# Altium PCB TimeTogetherCounter.PcbDoc
Units mil, origin at the board's own origin, x right, y up, seen from the top; angles counter-clockwise.
Board outline 2645.67 x 2677.01 mil, 4 copper layers (Top Layer, GND, PWR, Bottom Layer), stack 62.778 mil thick; 32 components, 21 nets, 141 pads, 55 vias.
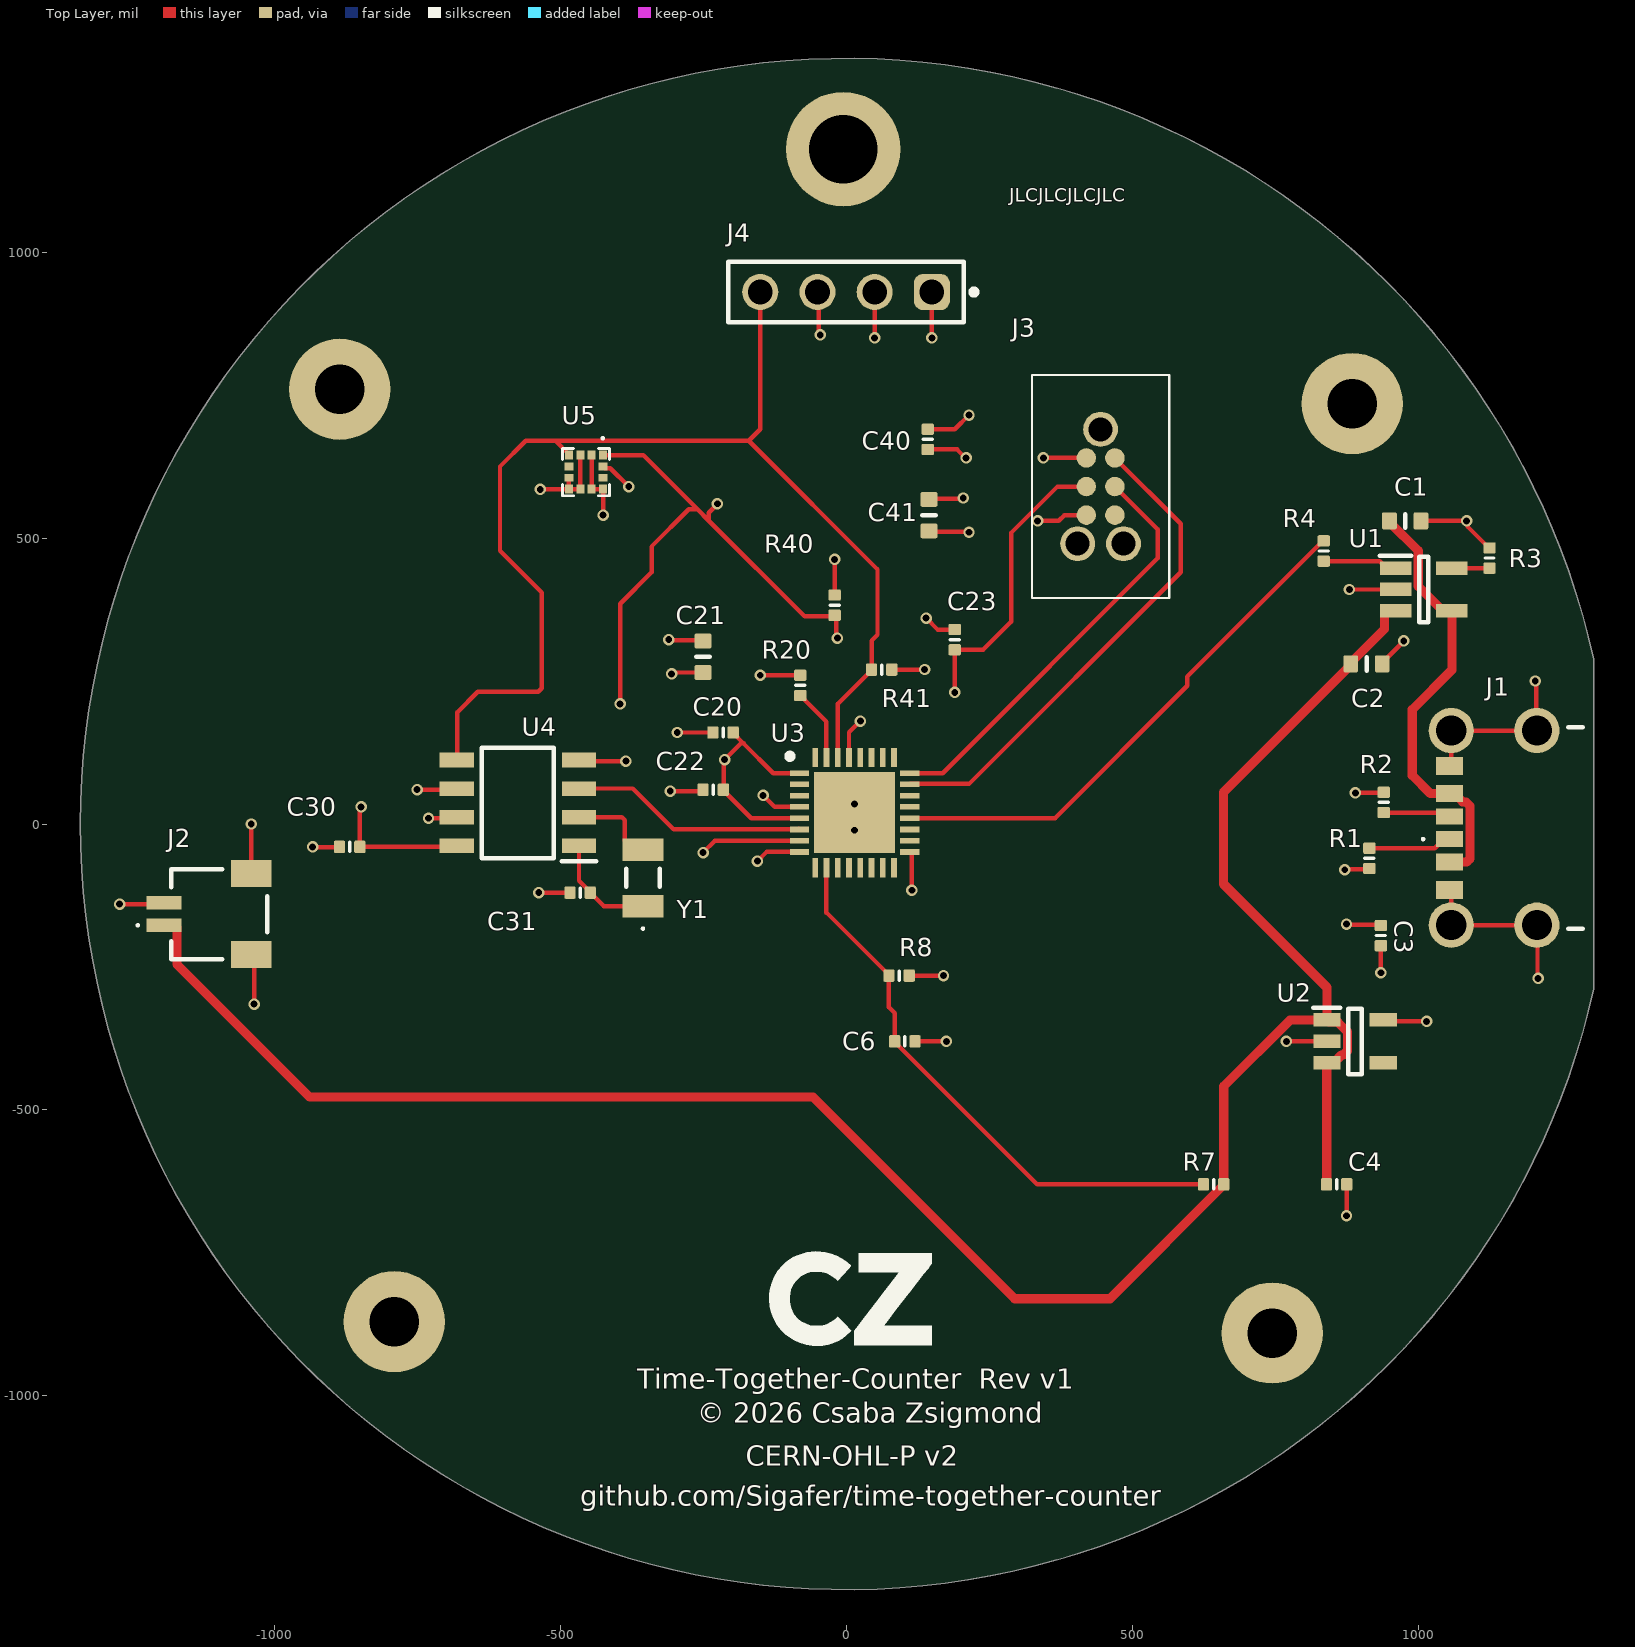
[diagram p0: Top Layer view]
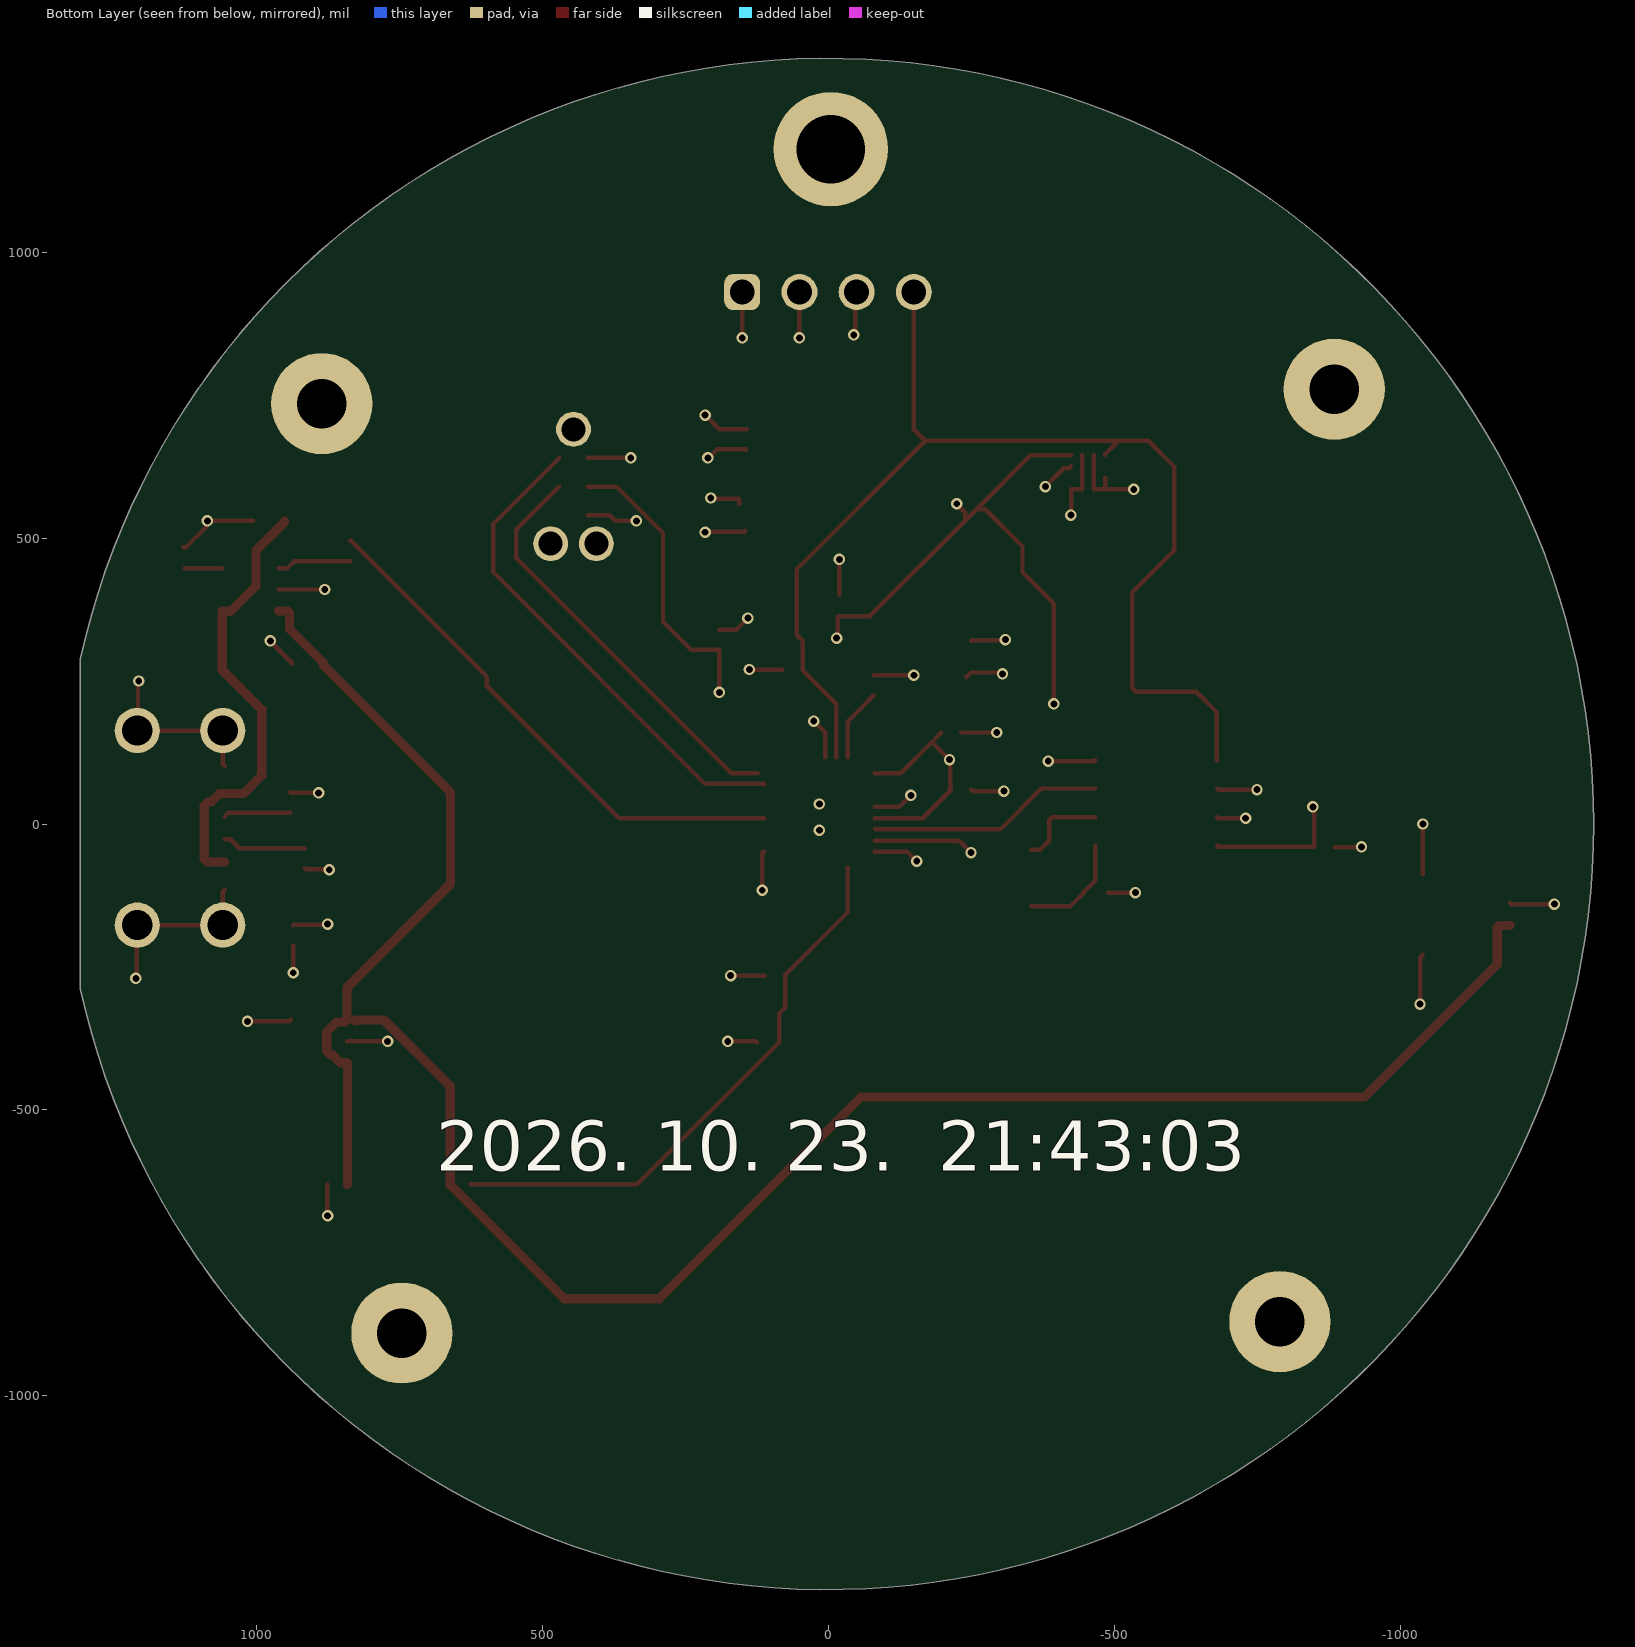
[diagram p1: Bottom Layer view, seen from below]
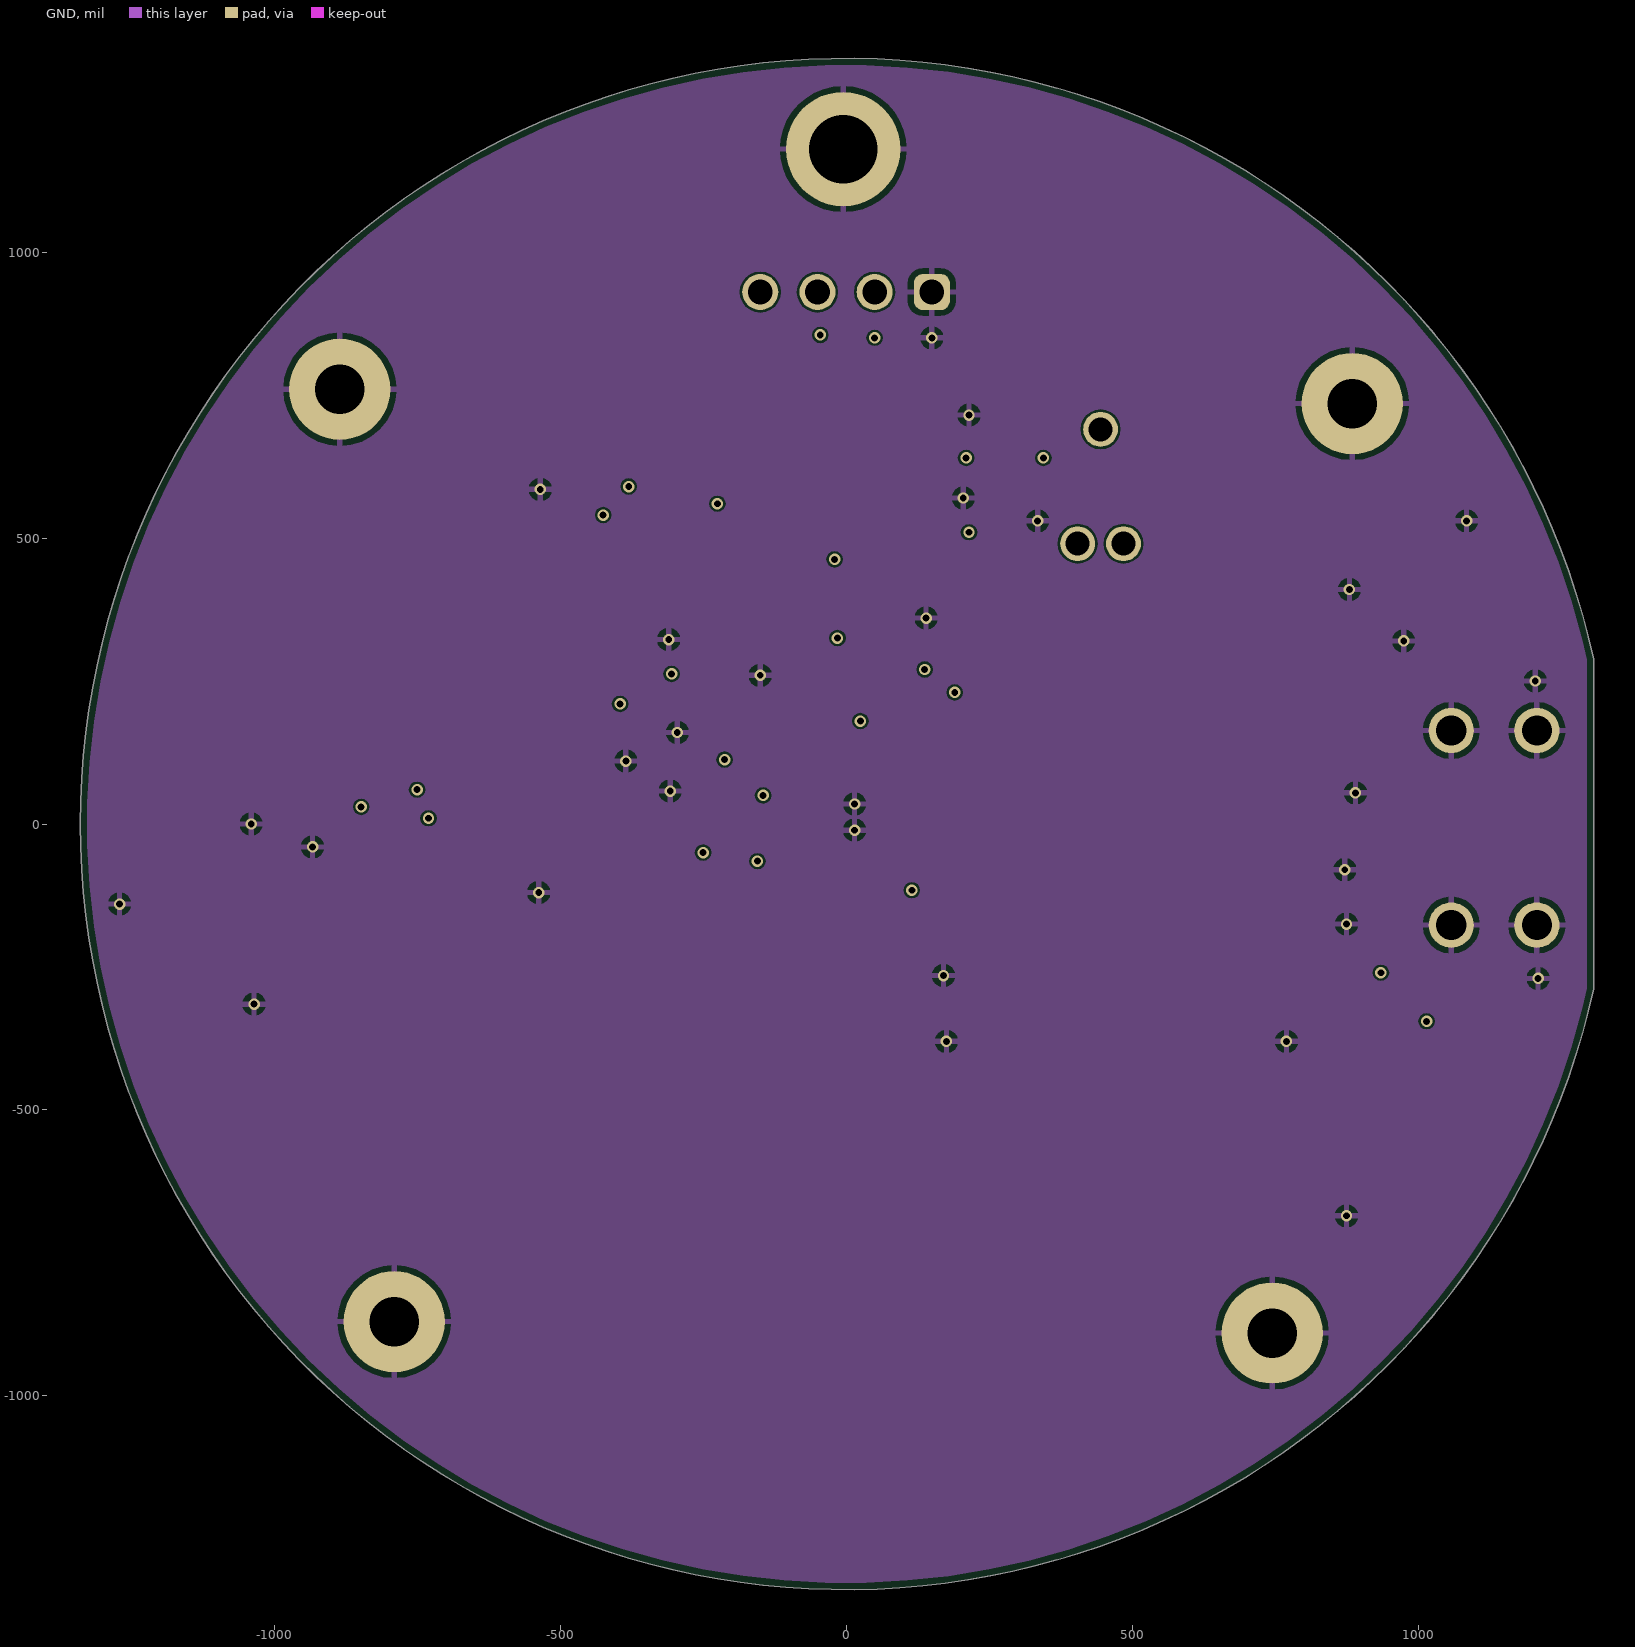
[diagram p2: GND]
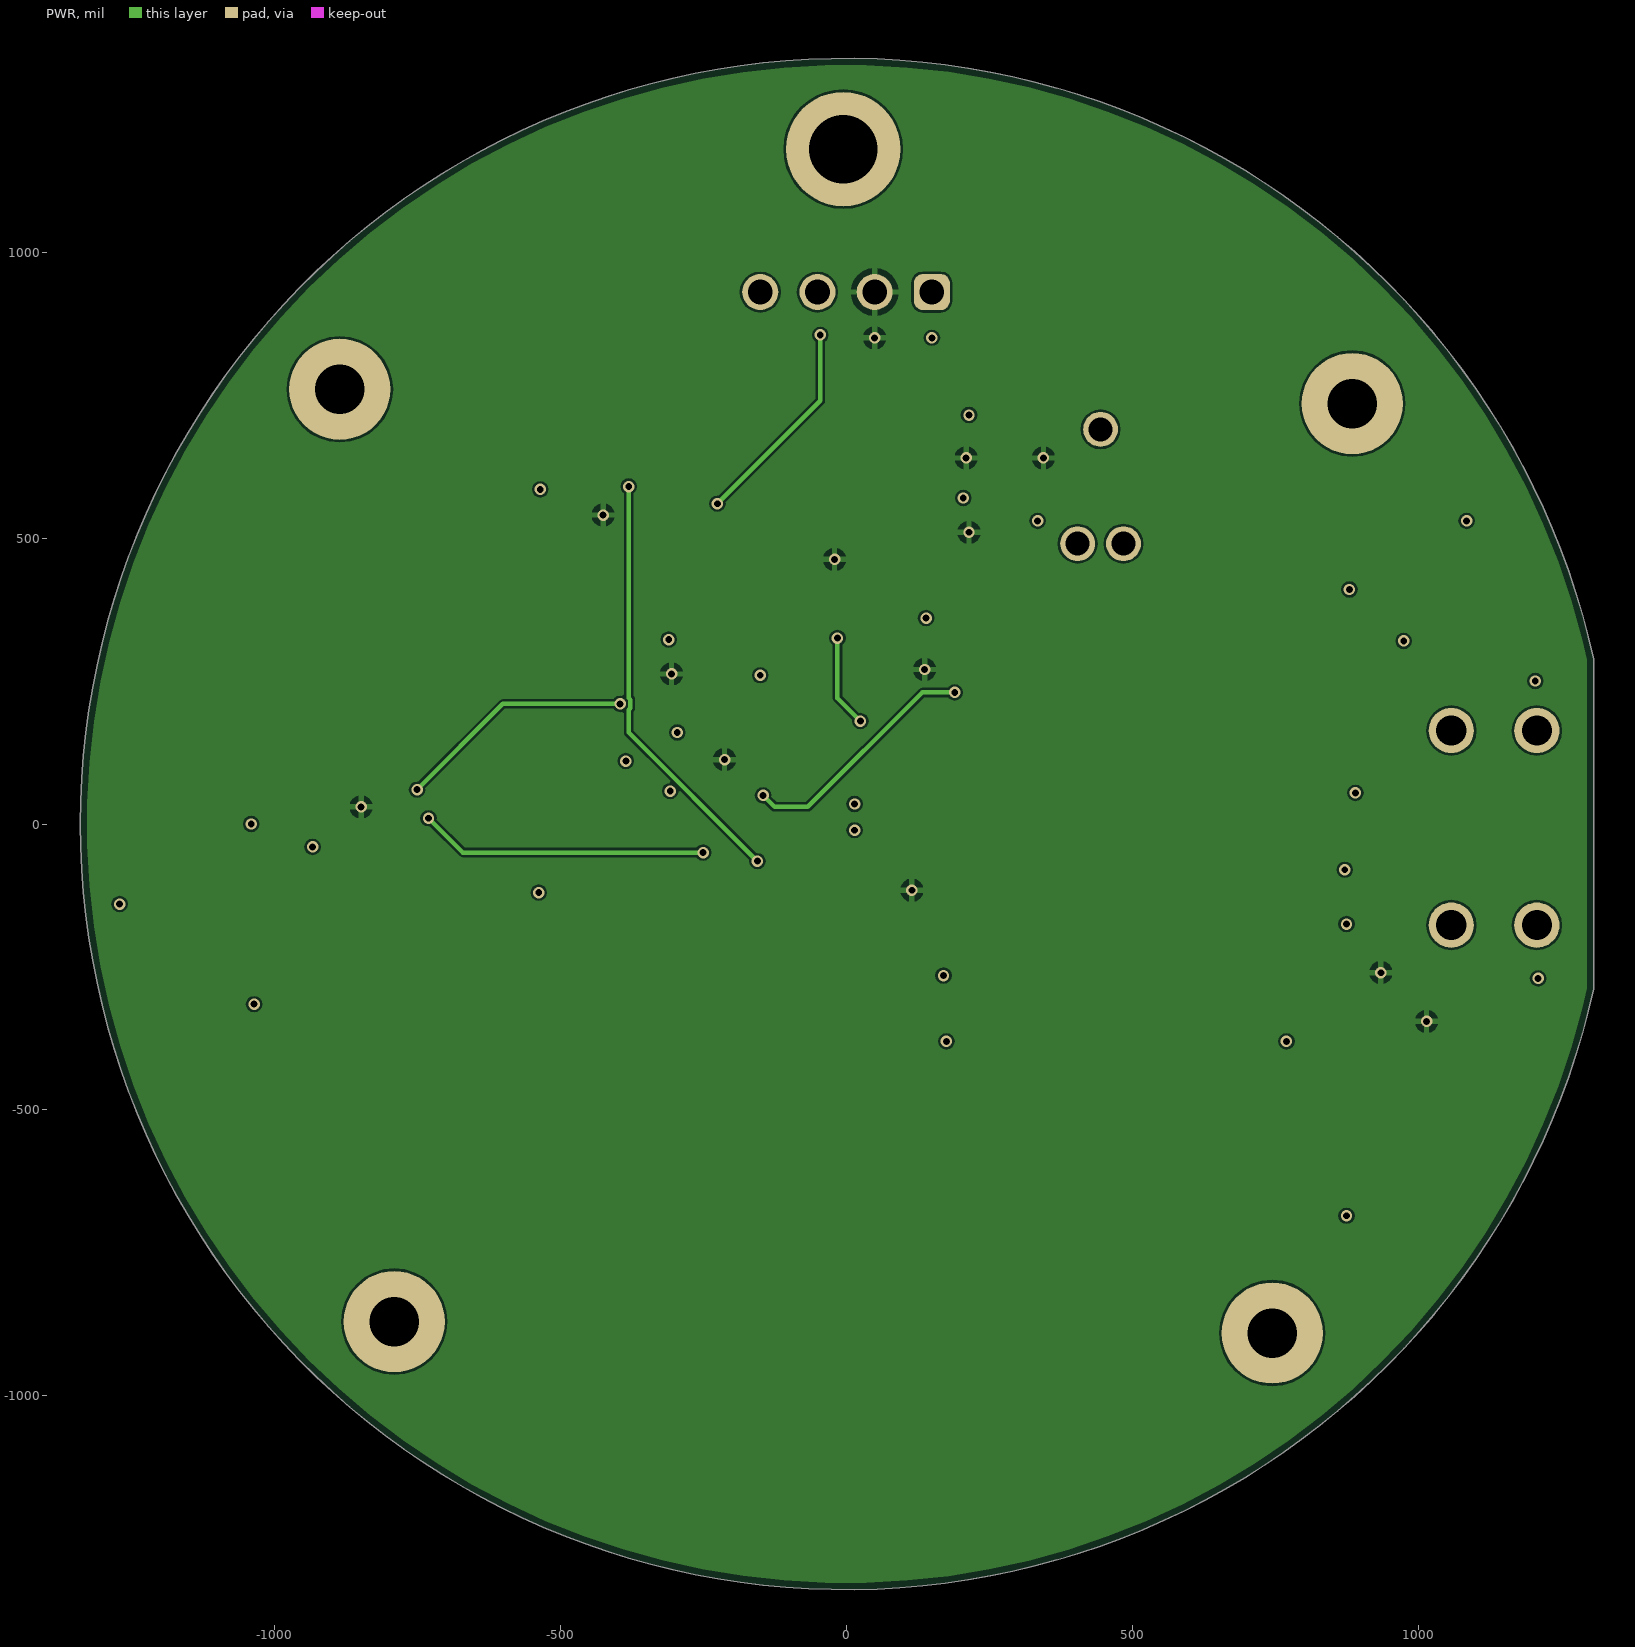
[diagram p3: PWR]

## Layer stack, top to bottom
Top Solder: solder mask 0.4, Solder Resist, Dk 3.5
Top Layer: signal copper 1.4
Dielectric 2: prepreg 8.3, PP-006, Dk 4.1
GND: signal copper 0.689
Dielectric 1: dielectric 42, FR-4, Dk 4.8
PWR: signal copper 0.689
Dielectric 3: prepreg 8.3, PP-006, Dk 4.1
Bottom Layer: signal copper 1.4
Bottom Solder: solder mask 0.4, Solder Resist, Dk 3.5

## Board outline
1307.09,-288.67 cw(c0,0) 1307.09,288.67 1307.09,288.66

## Design rules (kind name [scope] priority, off if disabled: settings)
BoardOutlineClearance [All] p1: gap=12 ignorepadtopadclearanceinfootprint=FALSE
Clearance [All] p1: gap=4 ignorepadtopadclearanceinfootprint=FALSE
ComponentClearance [All] p1: gap=8 collisioncheckmode=3 verticalgap=10 showdistances=FALSE
HoleSize [All] p1: absolutevalues=TRUE maxlimit=248 minlimit=8 maxpercent=80.000 minpercent=20.000
MinimumSolderMaskSliver [All] p1: minsoldermaskwidth=4
PolygonConnect [All] p1: connectstyle=Relief reliefconductorwidth=10 reliefentries=4 polygonreliefangle="90 Angle" airgapwidth=10
RoutingLayers [All] p1: top layer_v5=TRUE mid layer 1_v5=FALSE mid layer 2_v5=TRUE bottom layer_v5=FALSE
RoutingVias [All] p1: holewidth=12 width=20 viastyle="Through Hole" minholewidth=12 minwidth=20 maxholewidth=28 maxwidth=50
SilkToSilkClearance [All] p1: silktosilkclearance=6
SilkToSolderMaskClearance [IsText Or IsRegion] p1: minsilkscreentomaskgap=10 clearancetoexposedcopper=FALSE
SolderMaskExpansion [All] p1: expansion=0 istentingtop=FALSE
SupplyNets "Schematic Supply Nets_3" [InNet('3V3')] p1: voltage=0.000
SupplyNets "Schematic Supply Nets_2" [InNet('VBUS')] p2: voltage=0.000
SupplyNets "Schematic Supply Nets_1" [InNet('VBAT')] p3: voltage=0.000
SupplyNets "Schematic Supply Nets" [InNet('GND')] p4: voltage=0.000
Width Power [InNet('VBUS') Or InNet('VBAT')] p1: maxlimit=40 minlimit=8 preferedwidth=16
Width [All] p2: maxlimit=39 minlimit=4 preferedwidth=7.8
24 further rules are at their usual default settings.

## Components (designator, comment, footprint, x,y, rotation, side; value= is the part's Value field where it differs from the comment)
C1 "Capacitor 4.7µF +/-20% 10V 0603" CAPC0603(1608)100_L 977.56,530 r0 top value=4.7µF
C2 "Capacitor 4.7µF +/-20% 10V 0603" CAPC0603(1608)100_L 910,280 r0 top value=4.7µF
C3 "Capacitor 1µF +/-20% 10V 0402" CAPC0402(1005)60_L 935,-195 r90 top value=1µF
C4 "Capacitor 1µF +/-20% 10V 0402" CAPC0402(1005)60_L 857.72,-630 r0 top value=1µF
C6 "Capacitor 100nF +/-20% 10V 0402" CAPC0402(1005)60_L 102.72,-380 r0 top value=100nF
C20 "Capacitor 100nF +/-20% 10V 0402" CAPC0402(1005)60_L -215,160 r180 top value=100nF
C21 "Capacitor 4.7µF +/-20% 10V 0603" CAPC0603(1608)100_L -250,292.44 r90 top value=4.7µF
C22 "Capacitor 100nF +/-20% 10V 0402" CAPC0402(1005)60_L -232.28,60 r180 top value=100nF
C23 "Capacitor 100nF +/-20% 10V 0402" CAPC0402(1005)60_L 190,322.28 r90 top value=100nF
C30 "Capacitor 100nF +/-20% 10V 0402" CAPC0402(1005)60_L -867.72,-40 r180 top value=100nF
C31 "Capacitor 100nF +/-20% 10V 0402" CAPC0402(1005)60_L -465,-120 r180 top value="20pf C0G"
C40 "Capacitor 100nF +/-20% 10V 0402" CAPC0402(1005)60_L 142.86,672.36 r90 top value=100nF
C41 "Capacitor 10µF +/-20% 10V 0603" CAPC0603(1608)100_L 145,540 r90 top value=10µF
J1 "USB4125-GF-A-0190" USB4125GFA0190 1176.26,-6.73 r90 top
J2 "SM02B-SRSS_TB__LF__SN_" SM02BSRSSTBLFSN -1102.36,-157.48 r90 top
J3 "TC2030-IDC-NL" TC2030IDCNL 445,590 r270 top
J4 "61300411121" 61300411121 0,930 r180 top
R1 "5D6KR2J" RESC0402(1005)_L 915,-60 r270 top value=5.6k
R2 "5D6KR2J" RESC0402(1005)_L 940,37.72 r90 top value=5.6k
R3 "10KR2F" RESC0402(1005)_L 1125,465 r90 top value=10k
R4 "10KR2F" RESC0402(1005)_L 835,477.28 r90 top value=10k
R7 "Resistor 1M +/-1 % 0402 63 mW" RESC0402(1005)_L 642.72,-630 r180 top value=1M
R8 "Resistor 1M +/-1 % 0402 63 mW" RESC0402(1005)_L 92.72,-265 r0 top value=1M
R20 "10KR2F" RESC0402(1005)_L -80,242.28 r90 top value=10k
R40 "4D7KR2F" RESC0402(1005)_L -20,382.72 r90 top value=4.7k
R41 "4D7KR2F" RESC0402(1005)_L 62.28,270 r180 top value=4.7k
U1 "MCP73831T-2ACI_OT" SOT95P270X145-5N 1010,410 r0 top
U2 "TPS7A0233DBVR" SOT95P280X145-5N 890,-380 r0 top
U3 "STM32L031K6U6" QFN50P500X500X60-33N-D 15,20 r0 top
U4 "BM8563ESA" SOIC127P600X175-8N -573.62,36.85 r180 top
U5 "LIS2DW12TR" LGA12R50P4X4_200X200X70 -454.68,615.24 r270 top
Y1 "Q13FC13500004" Q13FC13500004FC13532768KHZ125PF -355,-94.21 r90 top

## Footprints (in the part's own frame and the unit in brackets; to place one, negate y for a bottom-side part, rotate by r counter-clockwise, add the part's x,y. Pads: shape width x height; smd on the part's side, far side on the other; paste and mask are expansions set on the pad)
61300411121 [mm] "Pin Header, pitch 2.54 mm, THT, Vertical, single row, 4p"
  rrect50% 1.6x1.6 hole 1.1: 1(-3.81,0)
  round 1.6 hole 1.1: 2(-1.27,0) 3(1.27,0) 4(3.81,0)
  silkscreen extent -5.8,-1.35 5.23,1.35, body extent -5.08,-1.27 5.08,1.27, height 8.57
CAPC0402(1005)60_L [mm] "Chip Capacitor, Body 1.0x0.5mm, Height 0.6mm, IPC High Density"
  rrect25% 0.5x0.55 smd: 1(-0.45,0) 2(0.45,0)
  silkscreen extent 0,-0.2 0,0.2, body extent -0.5,-0.25 0.5,0.25, height 0.6
CAPC0603(1608)100_L [mm] "Chip Capacitor, Body 1.6x0.8mm, Height 1.0mm, IPC High Density"
  rrect25% 0.66x0.76 smd: 1(-0.7,0) 2(0.7,0)
  silkscreen extent 0,-0.3 0,0.3, body extent -0.8,-0.4 0.8,0.4, height 0.95
LGA12R50P4X4_200X200X70 [mm]
  rect 0.4x0.35 smd: 1(-0.76,0.75) 2(-0.76,0.25) 3(-0.76,-0.25) 4(-0.76,-0.75) 7(0.76,-0.75) 8(0.76,-0.25) 9(0.76,0.25) 10(0.76,0.75)
  rect 0.35x0.4 smd: 5(-0.25,-0.76) 6(0.25,-0.76) 11(0.25,0.76) 12(-0.25,0.76)
  silkscreen extent -1.55,-1.05 1.05,1.05
Q13FC13500004FC13532768KHZ125PF [mm]
  rect 1x1.8 smd: 1(-1.25,0) 2(1.25,0)
  silkscreen extent -2.3,-0.75 0.4,0.75
QFN50P500X500X60-33N-D [mm]
  rect 0.85x0.25 smd: 1(-2.45,1.75) 2(-2.45,1.25) 3(-2.45,0.75) 4(-2.45,0.25) 5(-2.45,-0.25) 6(-2.45,-0.75) 7(-2.45,-1.25) 8(-2.45,-1.75) 17(2.45,-1.75) 18(2.45,-1.25) 19(2.45,-0.75) 20(2.45,-0.25) 21(2.45,0.25) 22(2.45,0.75) 23(2.45,1.25) 24(2.45,1.75)
  rect 0.25x0.85 smd: 9(-1.75,-2.45) 10(-1.25,-2.45) 11(-0.75,-2.45) 12(-0.25,-2.45) 13(0.25,-2.45) 14(0.75,-2.45) 15(1.25,-2.45) 16(1.75,-2.45) 25(1.75,2.45) 26(1.25,2.45) 27(0.75,2.45) 28(0.25,2.45) 29(-0.25,2.45) 30(-0.75,2.45) 31(-1.25,2.45) 32(-1.75,2.45)
  rect 3.6x3.6 smd: 33(0,0)
  silkscreen extent -3,2.38 -2.75,2.62, body extent -2.55,-2.55 2.55,2.55, height 0.6
RESC0402(1005)_L [mm] "Chip Resistor, Body 1.0x0.5mm, IPC High Density"
  rrect25% 0.5x0.55 smd: 1(-0.45,0) 2(0.45,0)
  silkscreen extent 0,-0.2 0,0.2, body extent -0.5,-0.25 0.5,0.25, height 0.3
SM02BSRSSTBLFSN [mm]
  rect 0.6x1.55 smd: 1(-0.5,2.288) 2(0.5,2.288)
  rect 1.2x1.8 smd: MP1(-1.8,-1.587) MP2(1.8,-1.587)
  silkscreen extent -2,-2.29 2,3.5, body extent -2,-2.19 2,2.76, height 2.97
SOIC127P600X175-8N [mm]
  rect 1.525x0.65 smd: 1(-2.712,1.905) 2(-2.712,0.635) 3(-2.712,-0.635) 4(-2.712,-1.905) 5(2.712,-1.905) 6(2.712,-0.635) 7(2.712,0.635) 8(2.712,1.905)
  silkscreen extent -3.47,-2.45 1.6,2.58, body extent -3,-2.45 3,2.45, height 1.75
SOT95P270X145-5N [mm]
  rect 1.4x0.6 smd: 1(-1.25,0.95) 2(-1.25,0) 3(-1.25,-0.95) 4(1.25,-0.95) 5(1.25,0.95)
  silkscreen extent -1.95,-1.45 0.2,1.5, body extent -1.35,-1.45 1.35,1.45, height 1.45
SOT95P280X145-5N [mm]
  rect 1.2x0.6 smd: 1(-1.25,0.95) 2(-1.25,0) 3(-1.25,-0.95) 4(1.25,-0.95) 5(1.25,0.95)
  silkscreen extent -1.85,-1.45 0.3,1.5
TC2030IDCNL [mm]
  round 0.863 smd paste-2539.97: 1(-1.27,-0.635) 2(-1.27,0.635) 3(0,-0.635) 4(0,0.635) 5(1.27,-0.635) 6(1.27,0.635)
  round 1.55 hole 1.067: 7(-2.54,0) 8(2.54,-1.016) 9(2.54,1.016)
  silkscreen extent -4.95,-3.05 4.95,3.05, body extent -4.95,-3.05 4.95,3.05, height 18.77
USB4125GFA0190 [mm]
  rect 0.7x1.2 smd: A5(-0.5,3.08) B5(0.5,3.08)
  rect 0.76x1.2 smd: A9(1.52,3.08) B9(-1.52,3.08)
  rect 0.8x1.2 smd: A12(2.75,3.08) B12(-2.75,3.08)
  round 2.01 hole 1.34: MH1(-4.32,3) MH2(-4.32,-0.8) MH3(4.32,-0.8) MH4(4.32,3)
  silkscreen extent -4.47,-2.84 4.47,4.3, body extent -4.47,-3.45 4.47,3.45, height 3.26

## Part data
C1 C2 C21: library part CMP-001-00076-4, "Chip Capacitor, 4.7µF +/-20%, 10V, 0603, Thickness 1 mm", Case/Package=0603, Max Operating Temperature=85°C, Min Operating Temperature=-55°C, Tolerance=10%, Voltage Rating=10V, Mounting Technology=SMT, Pins=2
C3 C4: library part CMP-001-00063-3, "Chip Capacitor, 1µF +/-20%, 10V, 0402, Thickness 0.6 mm", Case/Package=0402, Max Operating Temperature=85°C, Min Operating Temperature=-55°C, Tolerance=10%, Voltage Rating=10V, Mounting Technology=SMT, Pins=2
C6 C20 C22 C23 C30 C31 C40: library part CMP-001-00061-3, "Chip Capacitor, 100nF +/-20%, 10V, 0402, Thickness 0.6 mm", Case/Package=0402, Max Operating Temperature=85°C, Min Operating Temperature=-55°C, Tolerance=20%, Voltage Rating=10V, Mounting Technology=SMT, Pins=2
C41: library part CMP-001-00075-4, "Chip Capacitor, 10µF +/-20%, 10V, 0603, Thickness 1 mm", Case/Package=0603, Max Operating Temperature=85°C, Min Operating Temperature=-55°C, Tolerance=10%, Voltage Rating=10V, Mounting Technology=SMT, Pins=2
J1: "Connector", Manufacturer_Name="GCT (GLOBAL CONNECTOR TECHNOLOGY)", Mouser Part Number=640-USB4125-GF-A-190, Datasheet Link=https://eu.mouser.com/datasheet/2/837/usb4125-2448699.pdf, Manufacturer_Part_Number=USB4125-GF-A-0190, Mouser Price/Stock=https://www.mouser.co.uk/ProductDetail/GCT/USB4125-GF-A-0190?qs=QNEnbhJQKvbCz4hEJBS24w%3D%3D
J2: library part SM02B-SRSS-TB__LF__SN_, "Connector", Manufacturer_Name="JST (JAPAN SOLDERLESS TERMINALS)", Manufacturer_Part_Number="SM02B-SRSS-TB (LF)(SN)", Datasheet Link=https://www.jst-mfg.com/product/pdf/eng/eSH.pdf, Height=2.9mm
J3: "Connector", Manufacturer_Name="Tag Connect", Height=18.669mm, Manufacturer_Part_Number=TC2030-IDC-NL
J4: library part CMP-1502-01064-4, "THT Vertical Pin Header WR-PHD, Pitch 2.54 mm, Single Row, 4 pins", Color=Black, Contact Resistance=20mΩ, Current Rating=3A, Max Operating Temperature=105°C, Min Operating Temperature=-40°C, Operating Supply Voltage=250V, Connector Type="Male Pin", Contact Material=Gold, Contact Mating Length=5.9944mm, Contact Plating=Gold, Gender=Male, Height=8.89mm, Lead Free="Lead Free", Lead Pitch=2.54mm, Mount="Through Hole", Number of Contacts=4, Number of Pins=4, Number of Positions=4, Number of Rows=1, Orientation=Vertical, Packaging=Bulk, Pitch=2.54mm, RoHS=Compliant, Termination=Solder, Voltage Rating=250V
R1 R2: library part CMP-009-00108-2, "5K6 0.063W 5% 0402 (1005 Metric)  SMD", Case/Package=0402, Power=63mW, Tolerance=5%, Mounting Technology=SMT, Pins=2
R3 R4 R20: library part CMP-009-00066-2, "10K 0.063W 1% 0402 (1005 Metric)  SMD", Case/Package=0402, Power=63mW, Tolerance=1%, Mounting Technology=SMT, Pins=2
R7 R8: library part CMP-009-00165-3, "Chip Resistor, 1 MOhms, +/-1 %, 63 mW, -55 to 155 degC, 0402", Case/Package=0402, Power=63mW, Tolerance=1%, Pins=2
R40 R41: library part CMP-009-00105-2, "4K7 0.063W 1% 0402 (1005 Metric)  SMD", Case/Package=0402, Power=63mW, Tolerance=1%, Mounting Technology=SMT, Pins=2
U1: "Integrated Circuit", Arrow Part Number=MCP73831T-2ACI/OT, Manufacturer_Name=Microchip, Mouser Part Number=579-MCP73831T-2ACIOT, Arrow Price/Stock=https://www.arrow.com/en/products/mcp73831t-2aci-ot/microchip-technology.html?utm_currency=USD&region=nac, Datasheet Link=http://ww1.microchip.com/downloads/en/DeviceDoc/20001984g.pdf, Height=1.45mm, Manufacturer_Part_Number=MCP73831T-2ACI/OT, Mouser Price/Stock=https://www.mouser.co.uk/ProductDetail/Microchip-Technology/MCP73831T-2ACI-OT?qs=yUQqVecv4qvbBQBGbHx0Mw%3D%3D
U2: "Integrated Circuit", Manufacturer_Name="Texas Instruments", Mouser Part Number=595-TPS7A0233DBVR, Arrow Part Number=TPS7A0233DBVR, Arrow Price/Stock=https://www.arrow.com/en/products/tps7a0233dbvr/texas-instruments.html?utm_currency=USD&region=nac, Datasheet Link=https://www.ti.com/lit/gpn/tps7a02, Height=1.45mm, Manufacturer_Part_Number=TPS7A0233DBVR, Mouser Price/Stock=https://www.mouser.co.uk/ProductDetail/Texas-Instruments/TPS7A0233DBVR?qs=QNEnbhJQKvZidySW4FDctA%3D%3D
U3: "Integrated Circuit", Manufacturer_Name=STMicroelectronics, Mouser Part Number=511-STM32L031K6U6, Arrow Part Number=STM32L031K6U6, Arrow Price/Stock=https://www.arrow.com/en/products/stm32l031k6u6/stmicroelectronics?utm_currency=USD&region=nac, Datasheet Link=https://www.st.com/resource/en/datasheet/stm32l031g4.pdf, Height=0.6mm, Manufacturer_Part_Number=STM32L031K6U6, Mouser Price/Stock=https://www.mouser.co.uk/ProductDetail/STMicroelectronics/STM32L031K6U6?qs=U58vgkJzipQU%2FBNiv87OVQ%3D%3D
U4: library part PCF8563T, "Integrated Circuit", Manufacturer_Name=NXP, Mouser Part Number=N/A, Datasheet Link=https://www.nxp.com/docs/en/data-sheet/PCF8563.pdf, Height=1.75mm, Manufacturer_Part_Number=PCF8563T, Mouser Price/Stock=https://www.mouser.co.uk/ProductDetail/NXP-Semiconductors/PCF8563T?qs=F5EMLAvA7IDH70aFPvsqMw%3D%3D
U5: "Accelerometer X, Y, Z Axis Â±2g, 4g, 8g, 16g 400Hz 12-LGA _2x2_", Package="LGA-12 STMicroelectronics", Availability=Unavailable, MF=STMicroelectronics, MP=LIS2DW12TR, Price=None, SnapEDA_Link=https://www.snapeda.com/parts/LIS2DW12TR/STMicroelectronics/view-part/621283/?ref=snap
Y1: library part Q13FC13500004_FC-135_32.768KHZ_12.5PF, "Crystal or Oscillator", Manufacturer_Name="Epson Timing", Manufacturer_Part_Number="Q13FC13500004 FC-135 32.768KHZ 12.5PF", Datasheet Link=https://support.epson.biz/td/api/doc_check.php?mode=dl&lang=en&Parts=FC-135, Height=0.9mm

## Free pads (board coordinates)
  round 177 hole 86.6: H1(745,-890) H2(-790,-870) H3(-885,760) H4(885,735)
  round 200 hole 120: K1(-5,1180)

## Via types
v1: diameter 20, hole 12, Top Layer to Bottom Layer, tented both sides, 55 vias

## Nets (pads, with @x,y where several pads share a name; then routed paths per layer and width w, separated by ;. In a path a pad name is that pad's centre, name@x,y a point inside that pad or via, vN(x,y) a via of type N, cw(c..) or ccw(c..) an arc to the next point about the centre after c; other vN are vias at no path point)
3V3: C3.1 C20.1 C21.1 C22.1 C30.1 C40.1 C41.1 J3.1 J4.2 R40.2 R41.1 U2.5 U3.1 U3.5 U3.17 U4.8 U5.2 U5.9 U5.10 | length 1446.1
  Top Layer w7.8: v1(-847.72,30) -850,27.72 C30.1 -682.24,-40 U4.8 ; U5.2 U5.9 U5.10 -424.88,585.04 -424.88,540.35 v1(-424.61,540.08) ; v1(-305,262.44) -301.7,262.44 -299.26,264.88 C21.1 C21.1@-241.51,256.39 ; C20.1 -197.28,159.02 -179.13,140.87 ; U3.5 -165.71,10.16 -214.57,59.02 C22.1 -213.48,61.08 -213.48,111.44 v1(-212.4,112.52) -184.06,140.87 -179.13,140.87 ; U3.1 -127.17,88.9 -179.13,140.87 ; R40.2 v1(-20,462.72) ; v1(50,850) J4.2 ; R41.1 80.08,270.08 137.4,270.08 v1(137.48,270.16) ; U3.17 113.98,-48.9 115,-49.92 v1(115,-115.83) ; C40.1 143.04,654.82 194.13,654.82 208.96,640 v1(210,640) ; C41.1 146.22,511.22 213.78,511.22 v1(215,510) ; v1(345,640) J3.1 ; v1(935,-260) C3.1 ; U2.5 941.61,-345 v1(1015,-345)
CHG_STAT: R4.2 U3.20 | length 933.9
  Top Layer w7.8: U3.20 365.47,10.16 596.77,241.46 596.77,257.76 834.02,495 R4.2
GND: C1.2 C2.2 C3.2 C4.2 C6.2 C20.2 C21.2 C22.2 C23.2 C30.2 C31.2 C40.2 C41.2 J1.A12 J1.B12 J1.MH1 J1.MH2 J1.MH3 J1.MH4 J2.2 J2.MP1 J2.MP2 J3.5 J4.1 pad.H1 pad.H2 pad.H3 pad.H4 pad.K1 R1.2 R2.2 R3.2 R8.2 R20.2 U1.2 U2.2 U3.33 U4.4 U5.3 U5.6 U5.7 U5.8 | length 2481.9
  Top Layer w7.8: v1(-1270,-140) -1194.65,-140 J2.2 ; v1(-1040,0) -1040,-86.5 J2.MP2 ; J2.MP1 -1035,-233.23 v1(-1035,-315) ; v1@-932.43,-40.29 C30.2@-885.72,-40.29 ; v1(-537.28,-120) C31.2@-490,-120 ; v1(-534.61,585.08) -534.49,585.2 -484.72,585.2 -484.41,585.51 -484.41,605.2 U5.6 ; U5.7 U5.8 U5.3 ; U4.4 -465,110 v1(-385,110) ; v1(-310,322.44) -308.78,321.22 -251.22,321.22 C21.2 ; v1@-304.47,57.15 -252.85,57.15 C22.2 ; v1(-295,160) C20.2 ; v1(-150,260) R20.2 ; R8.2 v1(170.43,-265) ; C6.2@124.33,-382.57 124.33,-382.04 126.38,-380 v1(175.43,-380) ; v1(140,360) 160,340 C23.2 ; C40.2@141.68,690.04 190.04,690.04 v1(215,715) ; v1(150,850) J4.1 ; C41.2@155.12,560.12 155.12,567.84 156.06,568.78 203.78,568.78 v1(205,570) ; v1(335,530) 371.78,530 381.78,540 J3.5 ; v1(770,-380) U2.2 ; v1(872,-80) 873.14,-78.86 913.86,-78.86 R1.2 ; v1(875,-685) 875.22,-684.78 875.22,-630.22 C4.2 ; v1(875,-175) 876.14,-176.14 933.86,-176.14 C3.2 ; v1(880,410) U1.2 ; v1(890.56,54.44) 891.05,54.94 939.51,54.94 R2.2 ; C2.2 937.56,281.96 975,319.4 v1(975,320) ; C1.2 v1(1085,530) 1087.33,527.67 1087.33,519.4 1123.19,483.55 R3.2@1127.27,483.55 ; J1.B12 1058.15,-118.15 J1.MH1 J1.MH2 1208.88,-177.93 1208.88,-268.88 v1(1210,-270) ; J1.A12 1058.15,104.68 J1.MH4 J1.MH3 1206.38,164.72 1206.38,248.62 v1(1205,250)
  other v1: -932.72,-40 15,-10.83 15,35 -307.4,57.52
NetC31_1: C31.1 U4.1 Y1.1 | length 192.5
  Top Layer w7.8: U4.1 -466.85,-99.45 -447.28,-119.02 C31.1 -447.28,-120.98 -441.34,-126.93 -440.36,-126.93 -423.86,-143.43 Y1.1
NetJ1_A5: J1.A5 R1.1 | length 146.6
  Top Layer w7.8: R1.1 1029.29,-42.28 1045.16,-26.42 J1.A5
NetJ1_B5: J1.B5 R2.1 | length 117.9
  Top Layer w7.8: R2.1 1047.95,20 J1.B5
NetR3_1: R3.1 U1.5 | length 65.8
  Top Layer w7.8: U1.5 1059.33,447.28 R3.1
NetR4_1: R4.1 U1.1 | length 130.8
  Top Layer w7.8: R4.1 932.87,459.57 945.04,447.4 U1.1
NetR20_1: R20.1 U3.31 | length 127.7
  Top Layer w7.8: R20.1 -79.02,224.57 -73.07,218.62 -73.07,217.64 -34.21,178.78 U3.31
NetU4_2: U4.2 Y1.2 | length 156.3
  Top Layer w7.8: U4.2 -391.85,11.85 -386.53,6.53 -386.53,-29.21 -370.75,-45 Y1.2
NRST: C23.1 J3.3 U3.4 | length 1011.9
  Top Layer w7.8: v1(-145,50) -124.92,29.92 -81.54,29.92 U3.4 ; v1(190,230) C23.1 239.57,304.57 288.55,353.55 288.55,508.86 369.69,590 J3.3
  PWR w7.8: v1(-145,50) -124.92,29.92 -66.73,29.92 133.35,230 v1(190,230)
RTC_CLK: U3.7 U4.7 | length 732.4
  Top Layer w7.8: v1(-730,10) -682.24,10 U4.7 ; v1(-250,-50) -229.21,-29.21 U3.7
  PWR w7.8: v1(-730,10) -670,-50 v1(-250,-50)
RTC_INT: U3.6 U4.3 | length 414.5
  Top Layer w7.8: U4.3 -466.65,62.05 -372.95,62.05 -301.38,-9.53 -83.5,-9.53 U3.6@-82.48,-8.51
SCL: J4.3 R40.1 U3.29 U4.6 U5.1 | length 2174.2
  Top Layer w7.8: v1(-750,60) -682.24,60 U4.6 ; U5.1 -425,645 -354.55,645 -259.77,550.23 ; v1@-395,207.02 -395,385 -340,440 -340,485 -274.77,550.23 -259.77,550.23 ; v1(-225,560) -225,558.86 -239.77,544.09 -239.77,530.23 ; J4.3 -47.33,927.33 -47.33,857.33 v1(-45,855) ; v1(-15,325) -17.33,327.33 -17.33,361.57 -18.73,362.96 -72.51,362.96 -239.77,530.23 ; U3.29 5.16,160.16 v1(25,180) ; -259.77,550.23 -239.77,530.23
  PWR w7.8: v1(-750,60) -600,210 v1(-395,210) ; v1(-225,560) -45,740 v1(-45,855) ; v1(-15,325) -15,220 v1(25,180)
SDA: J4.4 R41.2 U3.30 U4.5 U5.4 | length 2098.9
  Top Layer w7.8: U4.5 -680,112.24 -680,195 -643.85,231.15 -538.15,231.15 -532.1,237.2 -532.1,404.65 -605,477.55 -605,625 -560,670 -508.07,670 ; U5.4 -484.21,646.14 -508.07,670 ; J4.4 -150,690 -170,670 ; U3.30 -14.53,209.92 44.57,269.02 R41.2 44.57,320.55 55,330.98 55,445 -170,670 ; -508.07,670 -170,670
SWCLK: J3.4 U3.24 | length 733.6
  Top Layer w7.8: U3.24@123.27,88.9 168.9,88.9 545,465 545,515 J3.4
SWDIO: J3.2 U3.23 | length 874.8
  Top Layer w7.8: U3.23 112.24,70 215,70 585,440 585,525 J3.2
TAP_INT: U3.8 U5.12 | length 890.1
  Top Layer w7.8: U5.12 -421.77,622.09 -412.09,622.09 v1(-380,590) ; v1(-155,-65) -138.9,-48.9 U3.8
  PWR w7.8: v1(-380,590) -380,220.31 -377.1,217.41 -377.1,202.59 -380,199.69 -380,160 v1(-155,-65)
VBAT: C2.1 C4.1 J2.1 R7.1 U1.3 U2.1 U2.3 | length 3889.9
  Top Layer w16: J2.1 -1173.74,-177.17 -1169.93,-180.98 -1169.93,-245.07 -937.5,-477.5 -57.5,-477.5 295,-830 461.42,-830 660.43,-630.98 R7.1 660.43,-458.45 776.29,-342.6 825.17,-342.6 U2.1@827.07,-344.5 ; C4.1 840.39,-629.61 840.39,-417.8 U2.3 852.6,-417.4 866.19,-403.81 869.38,-403.81 876.41,-396.78 876.41,-363.22 859.6,-346.41 844.6,-346.41 U2.1 840.79,-285.79 660,-105 660,55.6 882.44,278.04 C2.1 882.44,281.96 941.23,340.75 941.23,368.79 945.04,372.6 U1.3
VBAT_SENSE: C6.1 R7.2 R8.1 U3.10 | length 997.1
  Top Layer w7.8: U3.10 -34.21,-154.8 75,-264.02 R8.1 75,-320.47 85,-330.47 C6.1 85,-380.98 334.02,-630 R7.2
VBUS: C1.1 J1.A9 J1.B9 U1.4 | length 772.6
  Top Layer w16: C1.1 950,528.04 1000.35,477.69 1000.35,415.72 1044.18,371.89 U1.4@1050.2,371.89 ; J1.B9 1084.76,-66.57 1090.62,-60.72 1090.62,31.7 1083.59,38.73 1078.04,38.73 1063.66,53.11 J1.A9 1021.89,53.11 990,85 990,200 1059.21,269.21 U1.4
pads on no net: J3.6 J3.7 J3.8 J3.9 U2.4 U3.2 U3.3 U3.9 U3.11 U3.12 U3.13 U3.14 U3.15 U3.16 U3.18 U3.19 U3.21 U3.22 U3.25 U3.26 U3.27 U3.28 U3.32 U5.5 U5.11

## Polygon pours and split planes (outlines as drawn)
GND on GND "GND_Plane" (solid, remove dead copper, pour order 2): 1307.09,-288.67 cw(c0,0) 1307.09,288.67 1307.09,288.66
3V3 on PWR "PWR_Plane" (solid, remove dead copper, pour order 3): 1307.09,-288.67 cw(c0,0) 1307.09,288.67 1307.09,288.66

## Silkscreen, mask and mechanical layers (free items; w line width, h text height)
Top Overlay:
  region: 13.98,-911.08 150.21,-911.08 150.21,-877.6 108.15,-877.45 66.08,-877.3 70.21,-871.91 78.05,-861.69 84.62,-853.13 106.54,-824.84 113.92,-815.38 124.67,-801.5 136.26,-786.52 143.36,-777.4 148.37,-771.01 150.21,-768.59 150.21,-750.44 21.91,-750.44 22.06,-767.2 22.21,-783.96 57.3,-783.94 85.31,-784.06 91.97,-784.63 59.99,-826.31 51.73,-837.02 43.16,-848 34.12,-859.71 17.58,-881.36 13.98,-885.98
  region: -122.2,-873.33 -117.9,-879.45 -112.43,-885.79 -106.39,-891.71 -100.4,-896.55 -90.85,-902.42 -80.55,-907.07 -69.89,-910.39 -59.25,-912.21 -49.86,-912.59 -40.46,-911.98 -31.43,-910.4 -23.12,-907.91 -14.27,-903.93 -6.46,-899.56 0.45,-894.19 6.83,-888.45 9.05,-886.15 5.59,-882.58 0.92,-877.59 -4.37,-871.9 -11.16,-864.66 -14.32,-861.69 -16.7,-863.73 -21.28,-867.52 -27.33,-871.21 -33.9,-874.31 -40.03,-876.29 -45.57,-877.06 -52.01,-877.25 -58.39,-876.87 -63.79,-875.93 -71.75,-873.1 -78.86,-869.08 -85.05,-863.99 -90.21,-857.97 -94.26,-851.14 -97.09,-843.64 -98.63,-835.58 -98.78,-827.11 -97.97,-820.69 -96.47,-814.64 -94.28,-808.98 -91.44,-803.76 -87.96,-799 -83.86,-794.75 -79.18,-791.03 -73.92,-787.89 -68.53,-785.45 -63.3,-783.85 -57.73,-782.98 -51.35,-782.72 -41.92,-783.45 -33.46,-785.73 -25.46,-789.74 -17.47,-795.66 -14.25,-798.12 4.78,-777.22 8.06,-773.16 8.42,-772.21 8.19,-771.57 2.22,-766.35 -6.68,-759.87 -16.05,-754.72 -25.84,-750.93 -35.98,-748.54 -44.4,-747.52 -52.74,-747.27 -60.93,-747.75 -68.93,-748.97 -76.7,-750.91 -84.19,-753.57 -91.35,-756.93 -98.13,-760.99 -105.11,-765.94 -110.9,-771.48 -119.02,-781.07 -125.41,-791.5 -130.09,-802.86 -133.11,-815.22 -134.04,-822.77 -134,-832.18 -133.06,-843.65 -130.89,-853.95 -127.32,-863.65
  text "JLCJLCJLCJLC" at 284.93,1080.44 h40
  text "Time-Together-Counter  Rev v1" at -365,-1000 h60
  text "© 2026 Csaba Zsigmond" at -260,-1058.73 h60
  text "CERN-OHL-P v2" at -175,-1134.33 h60
  text "github.com/Sigafer/time-together-counter" at -465,-1203.73 h60
Bottom Overlay:
  text "2026. 10. 23.  21:43:03" at 685,-635 h150
Mechanical 1:
  the board outline again, w3.94
Top Component Center:
  lines w3.94: -579.13,-328.74 579.13,-328.74 579.13,250 -579.13,250 ; -698.82,-675 -698.82,663.39 698.82,663.39 698.82,-675 -698.82,-675
Bottom Component Center:
  lines w3.94: -605,-570.87 -605,255.91 610.24,255.91 610.24,-570.87 -605,-570.87
LED OUTLINE:
  lines w10: 692,-315 -708,-315 -708,1010 692,1010 ; 692,-315 692,1010 ; 692,-315 692,1010